# Altium PCB PmodDA4.PcbDoc
Units mm, origin at the board's own origin, x right, y up, seen from the top; angles counter-clockwise.
Board outline 40.45 x 25.05 mm, 2 copper layers (Top Layer, Bottom Layer); 7 components, 14 nets, 40 pads, 19 vias.
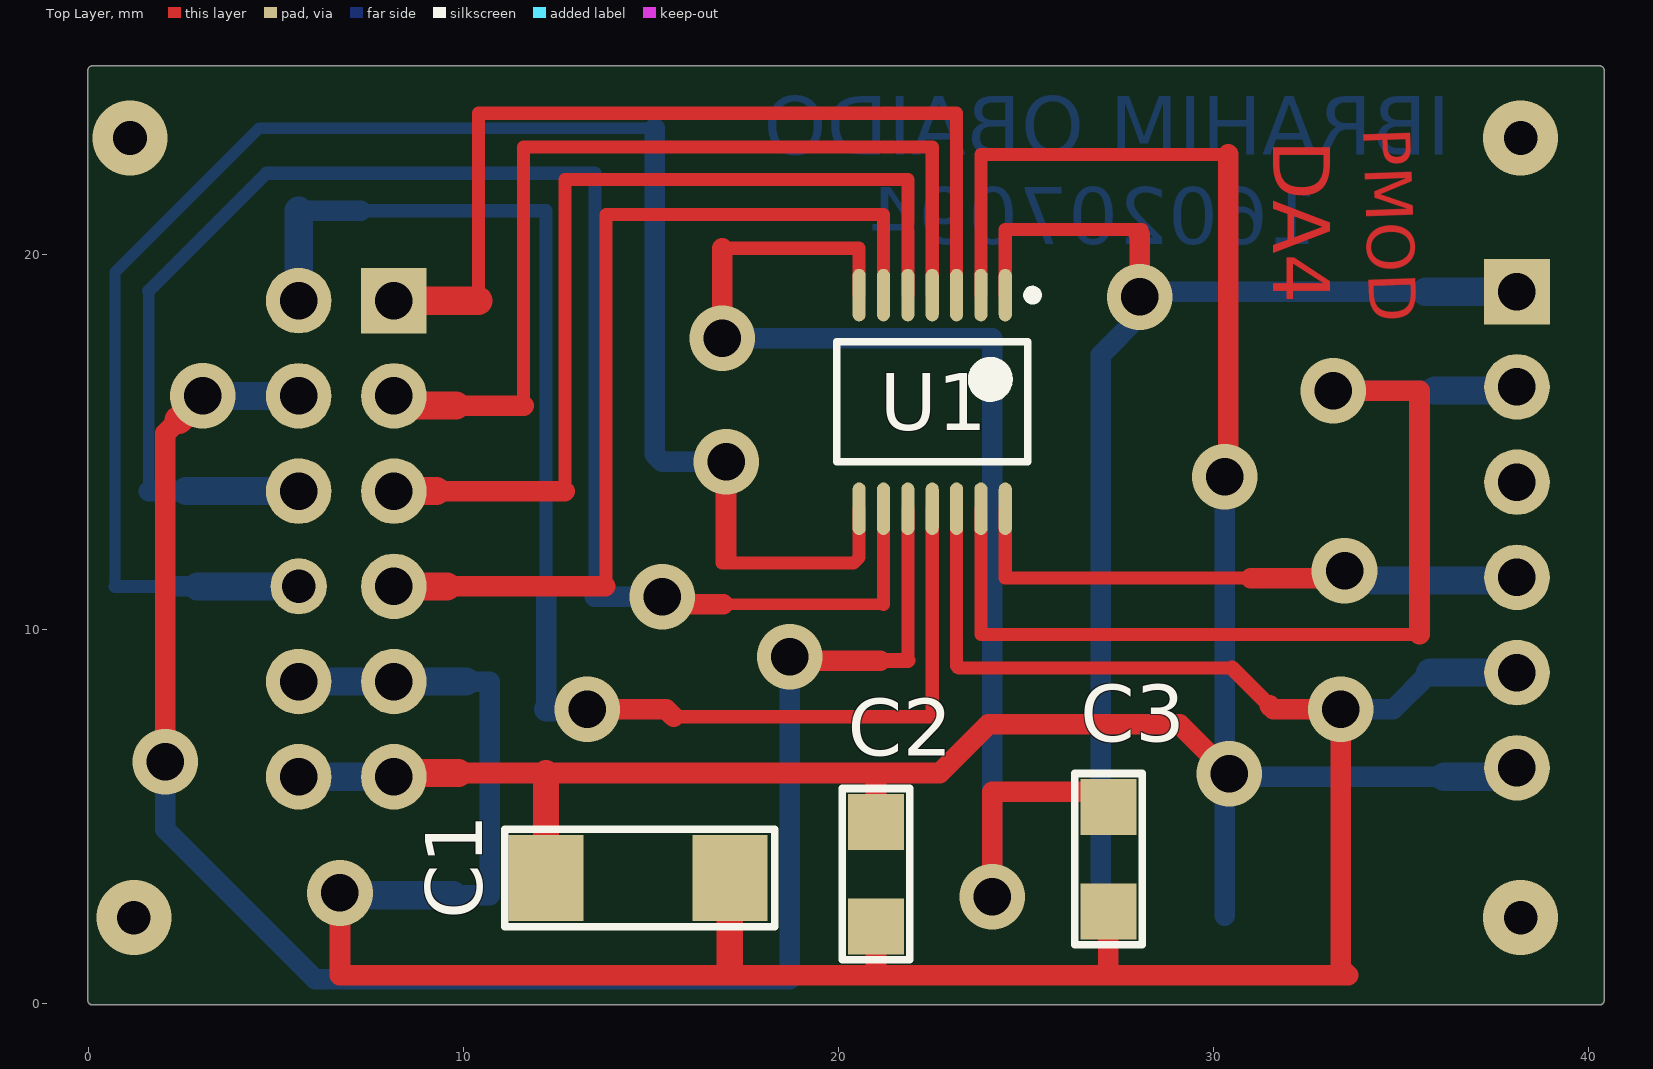
[diagram p0: Top Layer view]
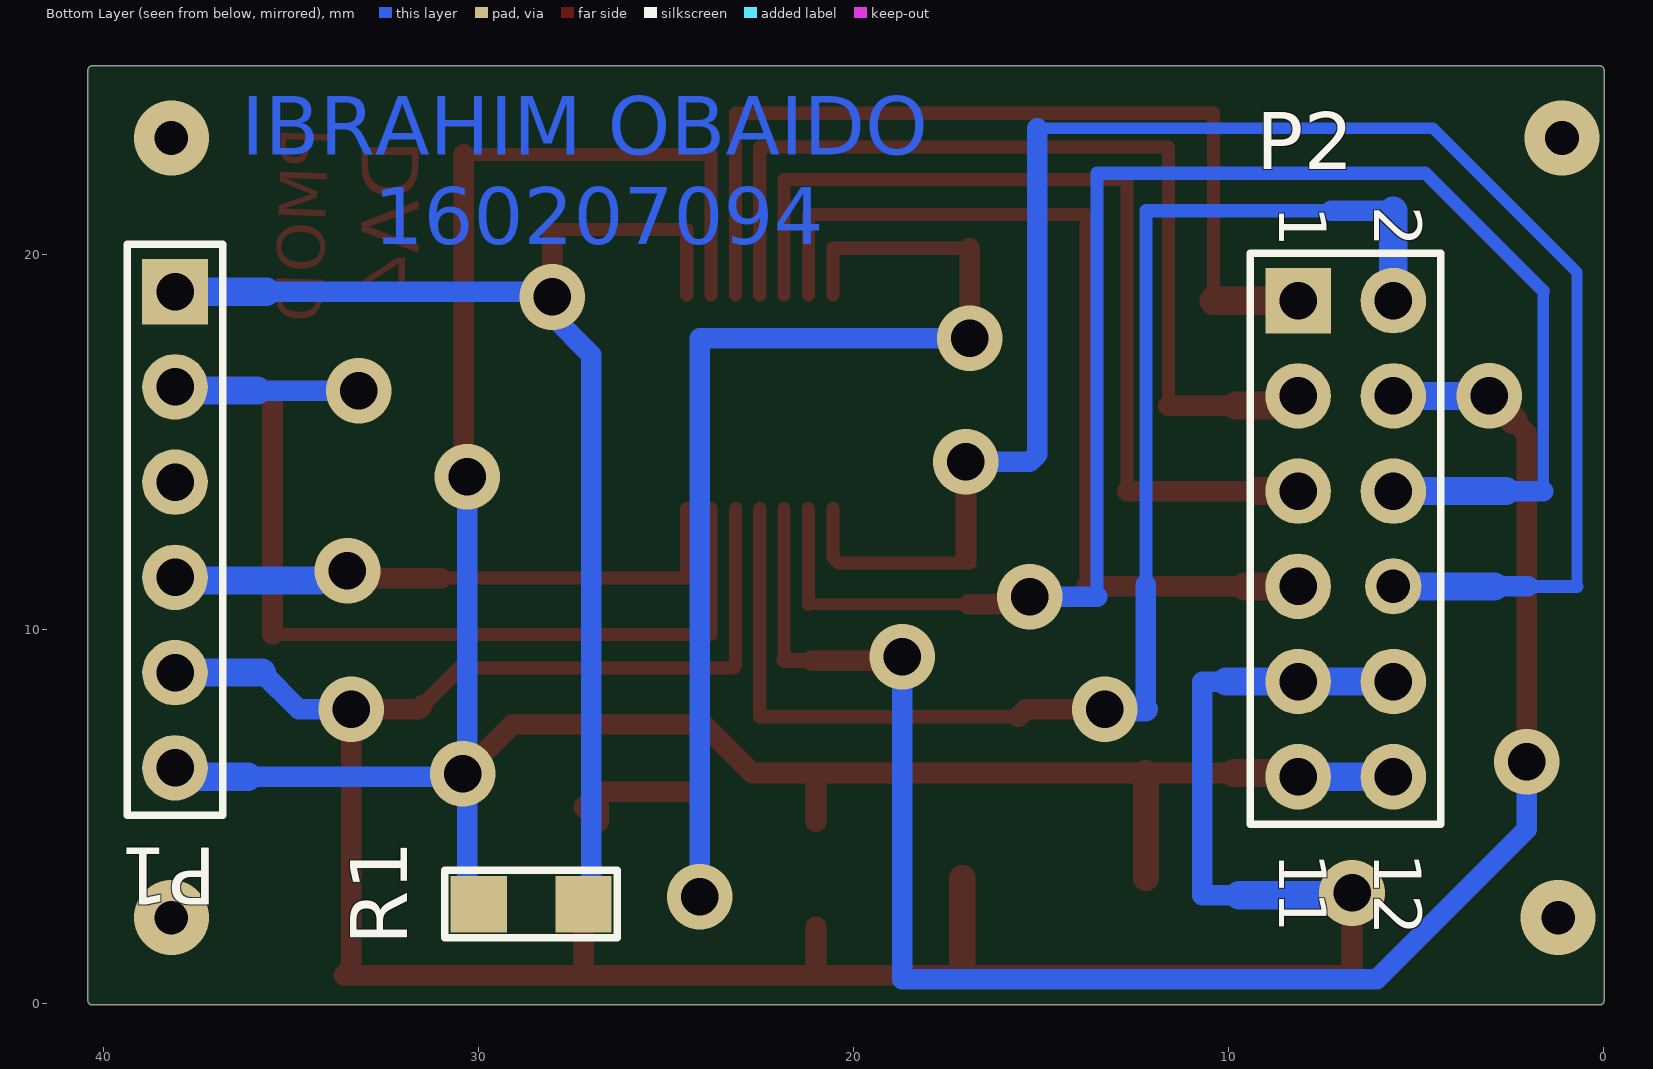
[diagram p1: Bottom Layer view, seen from below]

## Layer stack, top to bottom
Top Solder: solder mask 0.0102, Solder Resist, Dk 3.5
Top Layer: signal copper 0.0356
Dielectric 1: dielectric 0.32, FR-4, Dk 4.8
Bottom Layer: signal copper 0.0356
Bottom Solder: solder mask 0.0102, Solder Resist, Dk 3.5

## Board outline
0.1,-0.027 cw(c0.1,0.1) -0.027,0.1 -0.027,24.9 cw(c0.1,24.9) 0.1,25.027 40.3,25.027 cw(c40.3,24.9) 40.427,24.9 40.427,0.1 cw(c40.3,0.1) 40.3,-0.027

## Design rules (kind name [scope] priority, off if disabled: settings)
Clearance [All] p1: gap=0.254 ignorepadtopadclearanceinfootprint=FALSE except(0: Arc-Hole Track-Hole SMDPad-Hole THPad-Hole Via-Hole Fill-Hole Poly-Hole Region-Hole Text-Hole)
PolygonConnect [All] p1: connectstyle=Relief reliefconductorwidth=0.254 reliefentries=4 polygonreliefangle="90 Angle" airgapwidth=0.254
RoutingVias [All] p1: holewidth=1 width=1.75 viastyle="Through Hole" minholewidth=0.85 minwidth=1.5 maxholewidth=1.1 maxwidth=2
SolderMaskExpansion [All] p1: expansion=0.102 istentingtop=FALSE
Width [All] p1: maxlimit=0.75 minlimit=0.2 preferedwidth=0.3
30 further rules are at their usual default settings.

## Classes and differential pairs
component class PmodDA4: C2 C3 P1 P2 R1

## Components (designator, comment, footprint, x,y, rotation, side; value= is the part's Value field where it differs from the comment)
C1 "Capacitor" CAPC3812N 15.2,3.36 r0 top value=0.10µF
C2 "Capacitor" SMD-1206C 21,3.46 r0 top value=0.10µF
C3 "Capacitor" SMD-1206C 27.2,3.86 r0 top value=0.10µF
P1 "Header 6" HDR1X6 38.1,19 r270 bottom
P2 "Header 6X2" HDR2X6 8.14,18.76 r270 bottom
R1 "Resister" 8-1206 28.6,2.66 r180 bottom
U1 "AD5628BRUZ-1" TI-PW14_N 22.5,16.06 r270 top

## Footprints (in the part's own frame and the unit in brackets; to place one, negate y for a bottom-side part, rotate by r counter-clockwise, add the part's x,y. Pads: shape width x height; smd on the part's side, far side on the other; paste and mask are expansions set on the pad)
8-1206 [mm] "Chip Resistor; Body 3 x 1mm (LxW typ)"
  rect 1.5x1.5 smd: 1(-1.4,0) 2(1.4,0)
  silkscreen extent -2.3,-0.9 2.3,0.9
CAPC3812N [mm] "Chip Capacitor, Body 5x2mm, IPC Medium Density"
  rect 2x2.3 smd: 1(-3,0) 2(1.9,0)
  silkscreen extent -4.1,-1.3 3.1,1.3, body extent -2.1,-0.82 2.1,0.82, height 1.66
HDR1X6 [mm] "Connector; Header; 6 Position"
  rect 1.75x1.75 hole 1: 1(0,0)
  round 1.75 hole 1: 2(2.54,0) 3(5.08,0) 4(7.62,0) 5(10.16,0) 6(12.7,0)
  silkscreen extent -1.27,-1.27 13.97,1.27
HDR2X6 [mm] "Connector; Header; 6x2 Position"
  rect 1.75x1.75 hole 1: 1(0,0)
  round 1.75 hole 1: 2(0,2.54) 3(2.54,0) 4(2.54,2.54) 5(5.08,0) 6(5.08,2.54) 7(7.62,0) 9(10.16,0) 10(10.16,2.54) 11(12.7,0) 12(12.7,2.54)
  round 1.5 hole 0.9: 8(7.62,2.54)
  silkscreen extent -1.27,-1.27 13.97,3.81
SMD-1206C [mm]
  rect 1.5x1.5 smd: 1(0,1.397) 2(0,-1.397)
  silkscreen extent -0.9,-2.29 0.9,2.29, body extent -0.8,-1.6 0.8,1.6, height 1
TI-PW14_N [mm] "SOP, 14-Leads, Body 5x4.4mm, Pitch 0.65mm, IPC Medium Density"
  oval 1.4x0.35 smd: 1(-2.85,1.95) 2(-2.85,1.3) 3(-2.85,0.65) 4(-2.85,0) 5(-2.85,-0.65) 6(-2.85,-1.3) 7(-2.85,-1.95) 8(2.85,-1.95) 9(2.85,-1.3) 10(2.85,-0.65) 11(2.85,0) 12(2.85,0.65) 13(2.85,1.3) 14(2.85,1.95)
  silkscreen extent -2.97,-2.55 1.6,2.8, body extent -2.25,-2.55 2.25,2.55, height 1.2

## Part data
C1 C2 C3: library part LLM315R71C104MA11L, "CAP CER 0.1UF 16V X7R 1206", Digi-Key Part Number=490-4495-1-ND, Manufacturer="Murata Electronics North America", Operating Temperature="-55°C ~ 125°C", Package / Case="1206 (3216 Metric)", Ratings=-, Temperature Coefficient=X7R, Tolerance=±20%, Voltage=16V, @ qty=0, Applications="Bypass, Decoupling", Datasheets=http://www.murata.com/~/media/webrenewal/support/library/catalog/products/capacitor/mlcc/c02e.pdf, Factory Stock=0, Features="Low ESL (Multi-Terminal)", Height - Seated (Max)=-, Image=//media.digikey.com/Renders/Murata%20Renders/1206(LLM315).jpg, Lead Spacing=-, Lead Style=-, Minimum Quantity=1, Mounting Type="Surface Mount, MLCC", Packaging="Cut Tape (CT)", Part Number=LLM315R71C104MA11L, Part Status=Active, Quantity Available=2915, Series=LLM, Size / Dimension="0.126\" L x 0.063\" W (3.20mm x 1.60mm)", Thickness (Max)="0.022\" (0.55mm)", Unit Price (USD)=0.9
P1: "Header, 6-Pin", LatestRevisionDate=17-Jul-2002, LatestRevisionNote="Re-released for DXP Platform.", Publisher="Altium Limited"
P2: "Header, 6-Pin, Dual row", LatestRevisionDate=17-Jul-2002, LatestRevisionNote="Re-released for DXP Platform.", Publisher="Altium Limited"
R1: library part ERJP08J, "Anti-Surge Thick Film Chip Resistor, 10 Ohm to 1M Ohm Range, 5% Tolerance, 1206 Size, 0.25 W", PackageDocument=Mar-2003, Code_IPC="3216 [1206]", ComponentLink1Description="Manufacturer Link", ComponentLink1URL=http://www.panasonic.com/industrial/components/resistive_products.htm, ComponentLink2Description=Datasheet, ComponentLink2URL=http://www.panasonic.com/industrial/components/pdf/AOA0000CE4.pdf, LatestRevisionDate=19-Mar-2004, LatestRevisionNote="Silkscreen size reduced.", Note="If flow soldering, adjust pad width of PCB Footprint to 0.7 - 0.8 times the width of the resistor.", PackageReference=8-1206, Published=17-Dec-2003, Publisher="Altium Limited"
U1: library part MSP430L092SPW, "12-Bit Accuracy Guaranteed / 14/16-Lead TSSOP Package / On-chip 1.25/2.5V, 10ppm/°C Reference / Power-Down to 200 nA @ 5V, 50 nA @ 3V / 3V/5V Power Supply / Guaranteed Monotonic by Design / Power-On-Reset to Zero/Midscale / Three Power-Down Functions / Hardware /LDAC and /CLR functions / Rail-to-Rail Operation / Temperature Range -40°C to +125°C", Frequency(MHz)=4, Manufacturer="Texas Instruments", Supplier Part Number 1=296-32177-2-ND, Temp Sensor=Yes, ADC="8-bit SAR", ADC Channels=4, Brown Out Reset=Yes, Code_JEDEC=MO-153, Comparators=Yes, ComponentLink1Description="Manufacturer URL", ComponentLink1URL=http://www.ti.com/, ComponentLink2Description=Datasheet, ComponentLink2URL=http://www.ti.com/general/docs/lit/getliterature.tsp?genericPartNumber=MSP430L092&fileType=pdf, ComponentLink3Description="Package Specification", ComponentLink3URL=http://www.ti.com/litv/pdf/mpds360, DatasheetVersion=SLAS673, Eco-Plan="Green (RoHS & no Sb/Br)", GPIO=11, Mounting Technology="Surface Mount", PackageDescription="14-Pin Plastic Small Outline, Body 5 x 4.4 mm, 0.65 mm Pitch", PackageReference=PW14, PackageVersion=4040064-3/G, PartNumber=MSP430L092SPW, SRAM(B)=2048, SubFamily="Low Voltage Series", Supplier 1=Digi-Key, Supplier 2=Digi-Key, Supplier 3=Digi-Key, Supplier 4=Farnell, Supplier 5=Newark, Supplier 6=Mouser, Supplier Part Number 2=296-32177-1-ND, Supplier Part Number 3=296-32177-6-ND, Supplier Part Number 4=1903590, Supplier Part Number 5=48T4379, Supplier Part Number 6=595-P430G2553IRHB32T, SVS=Yes, Timers - 16-bit=2, Watchdog=Yes

## Via types
v1: diameter 1.75, hole 1, Top Layer to Bottom Layer, 15 vias
v2: diameter 2, hole 0.9, Top Layer to Bottom Layer, 4 vias

## Nets (pads, with @x,y where several pads share a name; then routed paths per layer and width w, separated by ;. In a path a pad name is that pad's centre, name@x,y a point inside that pad or via, vN(x,y) a via of type N, cw(c..) or ccw(c..) an arc to the next point about the centre after c; other vN are vias at no path point)
GND: C1.2 C2.2 C3.2 P1.5 P2.9 P2.10 U1.12 | length 77.5
  Top Layer w0.3: 17.1,0.86 17.2,0.76
  Top Layer w0.35: U1.12 23.15,9.01 23.2,8.96 30.5,8.96
  Top Layer w0.4: 30.5,8.96 31.5,7.96
  Top Layer w0.55: v1@6.9,2.96 6.7,2.76 6.7,0.76 17.2,0.76 21,0.76 ; C2.2 21,0.76 ; C3.2 27.2,0.76 ; 31.5,7.96 31.6,7.86 v1(33.4,7.86) ; v1@33.85,8.21 33.5,7.86 v1(33.4,7.86) ; 21,0.76 25.2,0.76 27.2,0.76 ; 27.2,0.76 33.6,0.76 33.4,0.96 v1(33.4,7.86)
  Top Layer w0.7: 17.1,0.86 C1.2
  Bottom Layer w0.3: v1(6.7,2.96) v1@6.76,2.9
  Bottom Layer w0.55: 9.715,2.9 10.7,2.9 10.7,8.6 10.06,8.6 ; v1(33.4,7.86) 34.8,7.86 35.78,8.84
  Bottom Layer w0.75: P2.10 P2.9 10.06,8.6 ; v1@6.76,2.9 9.715,2.9 ; 35.78,8.84 P1.5
NetC3_1: C3.1 U1.7 | length 35.5
  Top Layer w0.35: 16.9,20.16 20.55,20.16 U1.7
  Top Layer w0.55: v1@16.9,18.56 16.9,20.16 ; v1(24.1,2.86) 24.1,5.66 26.803,5.66 26.803,4.86 C3.1
  Bottom Layer w0.55: v1(16.9,17.76) 24.1,17.76 v1(24.1,2.86)
NetP1_1: P1.1 R1.2 U1.1 | length 34.1
  Top Layer w0.35: U1.1 24.45,20.66 28.1,20.66
  Top Layer w0.55: 28,20.56 28.04,20.52 v1(28.04,18.86)
  Bottom Layer w0.55: R1.2@27,2.46 27,17.32 28.04,18.36 v1(28.04,18.86) 28.18,19 35.665,19
  Bottom Layer w0.75: 35.665,19 P1.1
NetP1_2: P1.2 U1.13 | length 28.8
  Top Layer w0.35: U1.13 23.8,9.86 35.5,9.86
  Top Layer w0.55: v1(33.2,16.36) 35.5,16.36 35.5,9.86
  Bottom Layer w0.3: P1.2@38,16.36 P1.2
  Bottom Layer w0.55: v1(33.2,16.36) 35.9,16.36
  Bottom Layer w0.75: 35.9,16.36 P1.2@38,16.36
NetP1_4: P1.4 U1.14 | length 16
  Top Layer w0.35: U1.14 24.45,11.36 31,11.36 ; v1@32.8,11.36 v1@33.4,11.96
  Top Layer w0.55: 31,11.36 v1@32.8,11.36
  Bottom Layer w0.55: v1(33.5,11.56) 33.6,11.56 33.8,11.76 v1@34.26,11.3 ; P1.4@38.02,11.3 P1.4
  Bottom Layer w0.75: v1@34.26,11.3 P1.4@38.02,11.3
NetP2_1: P2.1 U1.3 | length 24.9
  Top Layer w0.35: 10.4,18.76 10.4,23.76 23.15,23.76 U1.3
  Top Layer w0.75: P2.1 10.4,18.76
NetP2_2: P2.2 U1.11 | length 38.2
  Top Layer w0.35: 15.6,7.66 22.5,7.66 U1.11
  Top Layer w0.55: v1(13.3,7.86) 15.4,7.86 15.6,7.66
  Bottom Layer w0.35: 7.25,21.16 12.2,21.16 12.2,11.185
  Bottom Layer w0.55: 5.6,21.16 7.25,21.16 ; 12.2,7.86 12.2,11.185
  Bottom Layer w0.65: 12.2,7.86 v1(13.3,7.86)
  Bottom Layer w0.75: P2.2 5.6,21.16
NetP2_3: P2.3 U1.4 | length 25.3
  Top Layer w0.3: P2.3 P2.3@8.4,15.96
  Top Layer w0.35: 11.6,15.96 11.6,22.86 22.5,22.86 U1.4
  Top Layer w0.55: 9.8,15.96 11.6,15.96
  Top Layer w0.75: P2.3@8.4,15.96 9.8,15.96
NetP2_4: P2.4 U1.10 | length 48.8
  Top Layer w0.35: 21.85,9.16 U1.10
  Top Layer w0.4: v1@18.7,9.36 v1@18.9,9.16 ; 21.112,9.16 21.85,9.16
  Top Layer w0.55: v1(2.04,6.46) 2.04,15.22 2.4,15.58 ; v1@18.9,9.16 21.112,9.16
  Top Layer w0.75: 2.4,15.58 v1(3.04,16.22)
  Bottom Layer w0.3: v1(3.04,16.22) v1@3.1,16.28
  Bottom Layer w0.55: v1(2.04,6.46) 2.04,4.66 6.04,0.66 18.7,0.66 v1(18.7,9.26)
  Bottom Layer w0.75: v1(3.04,16.22) P2.4
NetP2_5: P2.5 U1.5 | length 25.1
  Top Layer w0.35: 12.7,13.68 12.7,21.989 21.85,21.989 U1.5
  Top Layer w0.55: 9.28,13.68 12.7,13.68
  Top Layer w0.75: P2.5 9.28,13.68
NetP2_6: P2.6 U1.9 | length 44.2
  Top Layer w0.3: v1(15.3,10.86) v1@15.5,10.66 ; 16.925,10.66 21.204,10.66
  Top Layer w0.35: U1.9 21.204,13.206 21.204,10.66
  Top Layer w0.55: v1@15.5,10.66 16.925,10.66
  Bottom Layer w0.3: 1.6,13.68 1.6,19.02
  Bottom Layer w0.35: 1.6,19.02 4.74,22.16 13.5,22.16 13.5,10.86
  Bottom Layer w0.55: 1.6,13.68 2.6,13.68 ; 13.5,10.86 v1(15.3,10.86)
  Bottom Layer w0.75: 2.6,13.68 P2.6
NetP2_7: P2.7 U1.6 | length 25.1
  Top Layer w0.3: 13.78,11.14 13.8,11.16
  Top Layer w0.35: 13.8,11.16 13.8,21.06 21.2,21.06 U1.6
  Top Layer w0.55: 9.55,11.14 13.78,11.14
  Top Layer w0.75: P2.7 9.55,11.14
NetP2_8: P2.8 U1.8 | length 47.6
  Top Layer w0.35: 16.9,11.76 20.4,11.76 20.55,11.91 U1.8
  Top Layer w0.55: 17,11.86 v1(17,14.46)
  Bottom Layer w0.3: 0.7,11.14 0.7,19.52 4.54,23.36 15.1,23.36
  Bottom Layer w0.35: 0.7,11.14 2,11.14
  Bottom Layer w0.55: 2,11.14 2.9,11.14 ; 15.1,23.36 15.1,14.66 15.3,14.46 v1(17,14.46)
  Bottom Layer w0.75: 2.9,11.14 P2.8
VCC: C1.1 C2.1 P1.6 P2.11 P2.12 R1.1 U1.2 | length 68.8
  Top Layer w0.35: U1.2 23.8,22.66 ; 23.875,22.66 30.4,22.66
  Top Layer w0.55: 9.86,6.16 12.2,6.16 21,6.16 ; C2.1 21,6.16 ; v1(30.3,14.06) 30.4,14.16 30.4,22.66 ; v1(30.424,6.136) 29.1,7.46 24,7.46 22.7,6.16 21,6.16
  Top Layer w0.7: C1.1 12.2,6.16
  Top Layer w0.75: P2.11@8.04,6.16 9.86,6.16
  Bottom Layer w0.55: R1.1@30.3,2.36 v1@30.3,6.06 ; v1(30.3,14.06) v1@30.3,6.06 ; 36.15,6.06 v1@30.3,6.06 ; P1.6@38.1,6.06 P1.6
  Bottom Layer w0.75: P2.12 P2.11 ; 36.15,6.06 P1.6@38.1,6.06
pads on no net: P1.3
copper on no net:
  other v2: 1.2,2.3 38.2,2.3 1.1,23.1 38.2,23.1

## Other copper
Top Layer:
  text "PMOD" at 34,23.36 h1.25 r272
  text "DA4" at 31.6,23.06 h1.52 r270
Bottom Layer:
  text "IBRAHIM OBAIDO" at 36.34,22.66 h1.55
  text "160207094" at 32.8,20.26 h1.52
Multi-Layer:

## Text inside footprints (layer, text, board x,y; h text height)
P2: Bottom Overlay "2" at 6.108,21.3 h1.27 r90; Bottom Overlay "1" at 8.648,21.3 h1.27 r90; Bottom Overlay "1" at 8.648,4.028 h1.27 r90; Bottom Overlay "1" at 8.648,3.012 h1.27 r90; Bottom Overlay "12" at 6.108,4.028 h1.27 r90